# EAGLE board Wykrywacz metali PI (EAGLE 4.16)
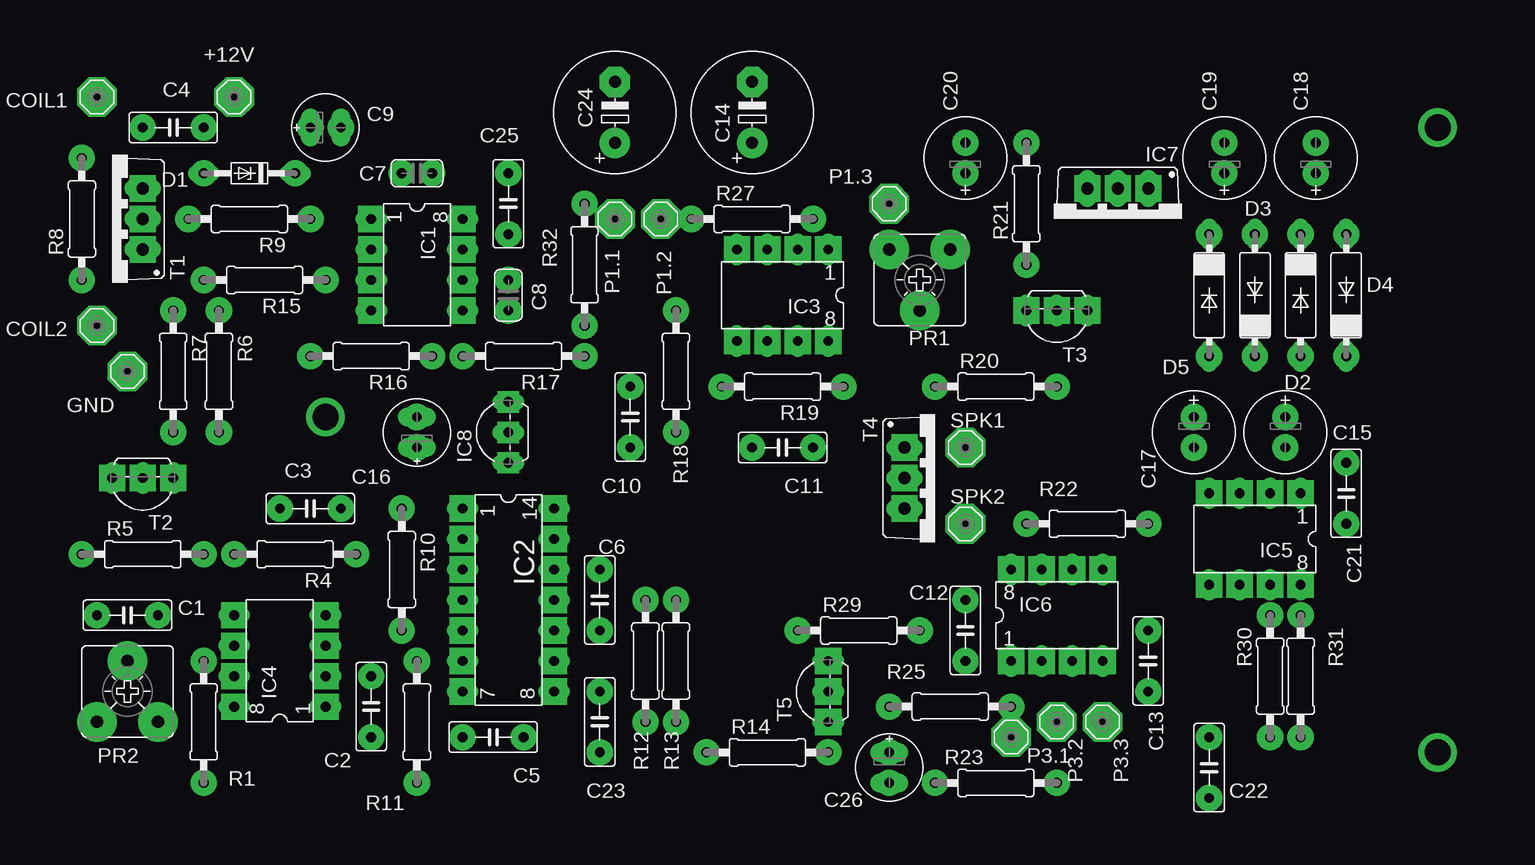
[diagram p0: board, top side]
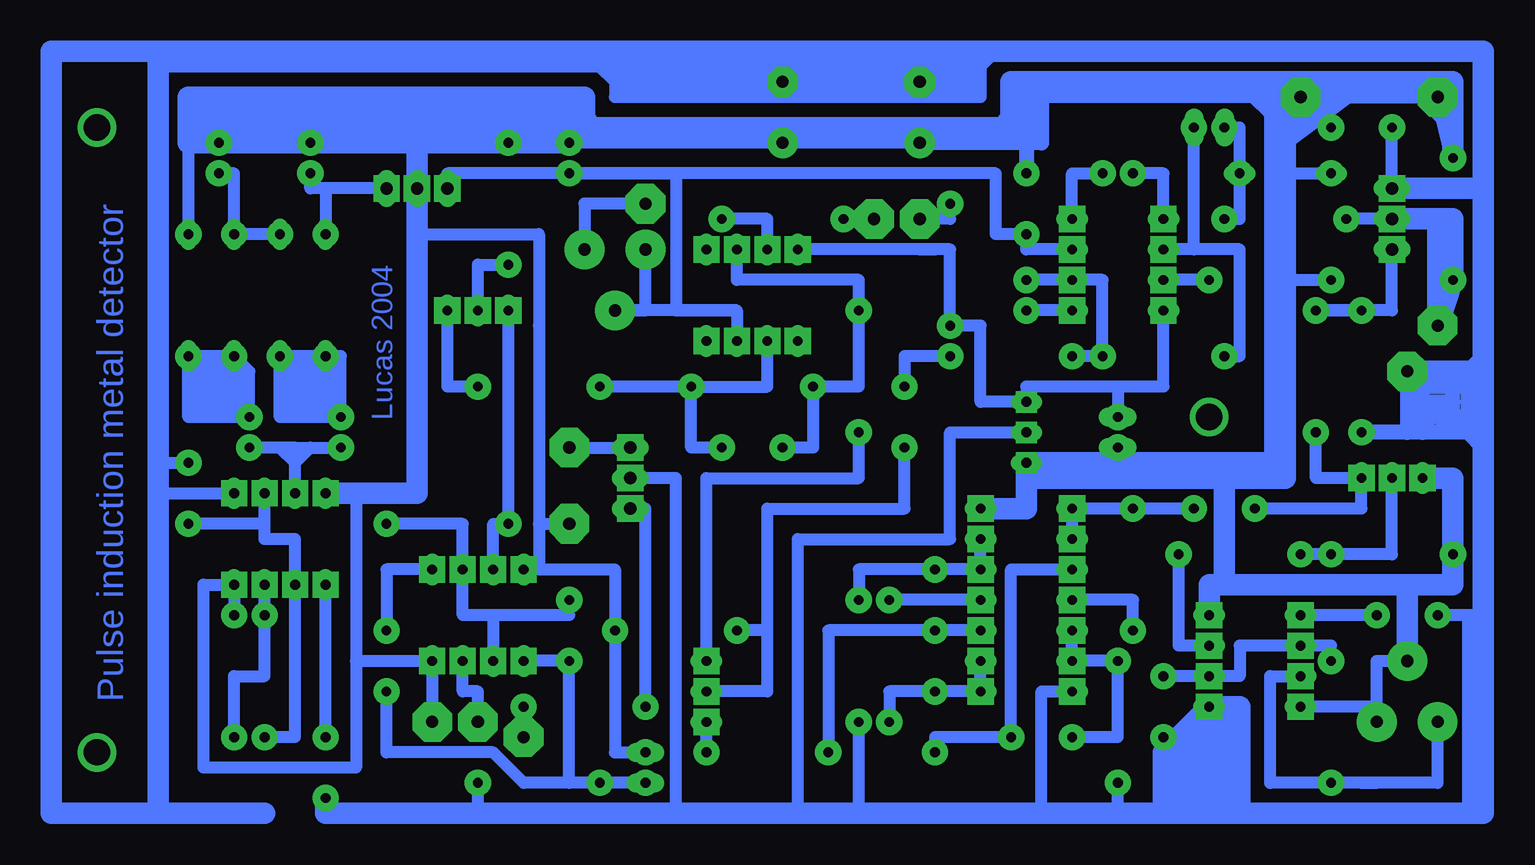
[diagram p1: board, bottom side, seen from below]

No outline drawn. Coordinates in mm, seen from the top.
Copper layers 16: Bottom 0.035mm
Design rules "default": minimum track width 10mil, minimum drill 24mil, track to track 8mil, track to pad 8mil, pad to pad 8mil, via to via 8mil, smd to smd 8mil, copper to edge 40mil, drill to drill 8mil, minimum pad ring 10mil, minimum via ring 8mil, stop-mask expansion 0mil, vias tented up to drill 0mil, thermal gap 10mil

## Footprints (pad centres in the part's own frame; a part is rotated, then mirrored left to right if it is on the bottom)
MCS10B = drill 1.016 pad 2.159 octagon: MP 0,0
C050-025X075 = drill 0.813 octagon: 1 -2.54,0; 2 2.54,0
C025-024X044 = drill 0.813 octagon: 1 -1.27,0; 2 1.27,0
E2,5-6E = drill 0.813 pad 1.575 long: + -1.27,0; - 1.27,0
E5-10,5 = drill 1.016 pad 2.54 round: + -2.54,0 | drill 1.016 pad 2.54 octagon: - 2.54,0
E2,5-7 = drill 0.813 pad 1.6 round: + -1.27,0 | drill 0.813 pad 1.6 octagon: - 1.27,0
DO34Z7 = drill 0.813 long: A 3.81,0; K -3.81,0
DO07 = drill 0.813 long: A 5.08,0; K -5.08,0
DIL08 = drill 0.813 long: 1 -3.81,-3.81; 2 -1.27,-3.81; 3 1.27,-3.81; 4 3.81,-3.81; 5 3.81,3.81; 6 1.27,3.81; 7 -1.27,3.81; 8 -3.81,3.81
DIL14 = drill 0.813 long: 1 -7.62,-3.81; 2 -5.08,-3.81; 3 -2.54,-3.81; 4 0,-3.81; 5 2.54,-3.81; 6 5.08,-3.81; 7 7.62,-3.81; 8 7.62,3.81; 9 5.08,3.81; 10 2.54,3.81; 11 0,3.81; 12 -2.54,3.81; 13 -5.08,3.81; 14 -7.62,3.81
TO220V = drill 1.016 long: 1 -2.54,-2.54; 2 0,-2.54; 3 2.54,-2.54
TO92- = drill 0.813 long: 1 2.54,-1.27; 2 0,-1.27; 3 -2.54,-1.27
CA6V = drill 1.016 long: 1 -2.54,-2.54; 2 0,2.54; 3 2.54,-2.54
0207/10 = drill 0.813 octagon: 1 -5.08,0; 2 5.08,0

## Placement (x,y rotation side)
+12V  [MCS10B]  2.54,80.01 0 top
C1  [C050-025X075]  -6.35,36.83 0 top
C2  [C050-025X075]  13.97,29.21 90 top
C3  [C050-025X075]  8.89,45.72 0 top
C4  [C050-025X075]  -2.54,77.47 0 top
C5  [C050-025X075]  24.13,26.67 0 top
C6  [C050-025X075]  33.02,38.1 90 top
C7  [C025-024X044]  17.78,73.66 180 top
C8  [C025-024X044]  25.4,63.5 90 top
C9  [E2,5-6E]  10.16,77.47 0 top
C10  [C050-025X075]  35.56,53.34 90 top
C11  [C050-025X075]  48.26,50.8 180 top
C12  [C050-025X075]  63.5,35.56 270 top
C13  [C050-025X075]  78.74,33.02 270 top
C14  [E5-10,5]  45.72,78.74 90 top
C15  [E2,5-7]  90.17,52.07 270 top
C16  [E2,5-6E]  17.78,52.07 90 top
C17  [E2,5-7]  82.55,52.07 270 top
C18  [E2,5-7]  92.71,74.93 90 top
C19  [E2,5-7]  85.09,74.93 90 top
C20  [E2,5-7]  63.5,74.93 90 top
C21  [C050-025X075]  95.25,46.99 270 top
C22  [C050-025X075]  83.82,24.13 270 top
C23  [C050-025X075]  33.02,27.94 90 top
C24  [E5-10,5]  34.29,78.74 90 top
C25  [C050-025X075]  25.4,71.12 90 top
C26  [E2,5-6E]  57.15,24.13 270 top
COIL1  [MCS10B]  -8.89,80.01 0 top
COIL2  [MCS10B]  -8.89,60.96 0 top
D1  [DO34Z7]  3.81,73.66 180 top
D2  [DO07]  91.44,63.5 270 top
D3  [DO07]  87.63,63.5 90 top
D4  [DO07]  95.25,63.5 90 top
D5  [DO07]  83.82,63.5 270 top
GND  [MCS10B]  -6.35,57.15 0 top
IC1  [DIL08]  17.78,66.04 270 top
IC2  [DIL14]  25.4,38.1 270 top
IC3  [DIL08]  48.26,63.5 180 top
IC4  [DIL08]  6.35,33.02 90 top
IC5  [DIL08]  87.63,43.18 180 top
IC6  [DIL08]  71.12,36.83 0 top
IC7  [TO220V]  76.2,69.85 180 top
IC8  [TO92-]  24.13,52.07 90 top
P1.1  [MCS10B]  34.29,69.85 0 top
P1.2  [MCS10B]  38.1,69.85 0 top
P1.3  [MCS10B]  57.15,71.12 0 top
P3.1  [MCS10B]  67.31,26.67 0 top
P3.2  [MCS10B]  71.12,27.94 0 top
P3.3  [MCS10B]  74.93,27.94 0 top
PR1  [CA6V]  59.69,64.77 180 top
PR2  [CA6V]  -6.35,30.48 0 top
R1  [0207/10]  0,27.94 90 top
R4  [0207/10]  7.62,41.91 180 top
R5  [0207/10]  -5.08,41.91 0 top
R6  [0207/10]  1.27,57.15 270 top
R7  [0207/10]  -2.54,57.15 270 top
R8  [0207/10]  -10.16,69.85 90 top
R9  [0207/10]  3.81,69.85 180 top
R10  [0207/10]  16.51,40.64 270 top
R11  [0207/10]  17.78,27.94 270 top
R12  [0207/10]  36.83,33.02 270 top
R13  [0207/10]  39.37,33.02 270 top
R14  [0207/10]  46.99,25.4 0 top
R15  [0207/10]  5.08,64.77 180 top
R16  [0207/10]  13.97,58.42 180 top
R17  [0207/10]  26.67,58.42 180 top
R18  [0207/10]  39.37,57.15 90 top
R19  [0207/10]  48.26,55.88 180 top
R20  [0207/10]  66.04,55.88 0 top
R21  [0207/10]  68.58,71.12 90 top
R22  [0207/10]  73.66,44.45 180 top
R23  [0207/10]  66.04,22.86 0 top
R25  [0207/10]  62.23,29.21 180 top
R27  [0207/10]  45.72,69.85 0 top
R29  [0207/10]  54.61,35.56 0 top
R30  [0207/10]  88.9,31.75 90 top
R31  [0207/10]  91.44,31.75 90 top
R32  [0207/10]  31.75,66.04 270 top
SPK1  [MCS10B]  63.5,50.8 0 top
SPK2  [MCS10B]  63.5,44.45 0 top
T1  [TO220V]  -7.62,69.85 90 top
T2  [TO92-]  -5.08,46.99 180 top
T3  [TO92-]  71.12,60.96 180 top
T4  [TO220V]  60.96,48.26 270 top
T5  [TO92-]  50.8,30.48 90 top

## Library data of the parts
+12V COIL1 COIL2 GND P1.1-P1.3 P3.1-P3.3 SPK1 SPK2 = solpad
C1-C26 R1 R4-R23 R25 R27 R29-R32 = rcl
D1-D5 = diode
IC1 IC3-IC6 = dil
IC2 = 40xx
IC7 IC8 T1-T5 = transistor-npn
PR1 PR2 = pot

## Nets
S$1: COIL2.MP R8.1 R9.2 T1.2
S$2: R6.1 R7.1 T1.1
S$3: C19.+ D5.K IC7.1
S$4: C10.2 R17.1
S$5: C3.1 R6.2 T2.3
S$6: R4.2 R5.2 T2.2
S$8: C3.2 IC2.1 IC2.2
S$9: IC4.3 R4.1
S$10: C16.+ C18.- C19.- C20.- C25.2 C26.+ COIL1.MP D1.A D4.A IC2.14 IC4.4 IC4.8 IC5.4 IC5.8 IC6.4 IC6.8 IC7.2 IC8.3 P3.3.MP PR2.2 PR2.3 R5.1 R8.2 R15.2 R21.2 R29.2 R31.2 SPK2.MP T2.1
S$11: C2.2 IC4.2 IC4.6 R1.2
S$12: C1.2 IC4.5
S$13: IC2.4 R10.2
S$14: C5.1 IC2.5 IC2.6 R11.1
S$15: C5.2 C23.1 IC2.3
S$16: C23.2 IC2.8 IC2.9 R12.2
S$17: C6.1 IC2.10 R14.1
S$18: C12.2 C13.2 C26.- IC6.1 R23.1
S$19: IC2.11 R12.1
S$20: C6.2 IC2.12 IC2.13 R13.1
S$21: C11.1 IC3.6 R19.1 R20.1
S$22: C9.+ D1.K R9.1
S$23: C7.2 IC1.1
S$24: C7.1 IC1.8
S$25: R18.1 T5.1
S$26: C8.1 IC1.5
S$27: C22.1 IC5.5
S$28: C9.- IC1.2 R16.2
S$29: IC1.3 R15.1
S$30: IC6.7 R22.2 T3.1
S$31: C8.2 IC1.6 R16.1 R17.2
S$32: C10.1 R29.1 T5.2
S$33: R14.2 T5.3
S$34: C1.1 C2.1 C14.- C21.1 C22.2 C24.- GND.MP IC2.7 IC4.1 IC5.1 IC8.2 R7.2 R11.2 R13.2 R23.2 T1.3 T4.2
S$35: C16.- IC1.4 IC3.4 IC8.1 R32.2
S$36: IC3.3 R27.2
S$37: C11.2 IC3.2 R18.2 R19.2
S$38: P3.1.MP R25.1
S$39: P1.1.MP R32.1
S$40: P1.2.MP R27.1
S$41: P1.3.MP PR1.1
S$42: R20.2 T3.3
S$43: R21.1 T3.2
S$44: C12.1 IC6.2 IC6.6 R22.1
S$47: C21.2 IC5.2 IC5.6 R30.1
S$48: IC5.7 R30.2 R31.1
S$49: C15.- C17.- IC5.3
S$50: C17.+ D3.K D5.A
S$51: C15.+ D2.A D4.K
S$52: D2.K D3.A
S$53: IC4.7 PR2.1 R1.1
S$54: C13.1 IC6.5
S$55: C20.+ C25.1 IC1.7 IC3.7 IC7.3 PR1.2 PR1.3

## Tracks (layer width: path | path; a pad name or v marks a point on that pad's centre or on a via)
S$1  (via drill 0.25 pad 3.3)
  Bottom 1.016: T1.2 R9.2 | COIL2.MP R8.1
  Bottom 1.778: -8.89,69.85 -10.16,69.85 R8.1 COIL2.MP -8.89,69.85 | -8.89,69.85 T1.2
  other vias: -8.89,60.96
S$2
  Bottom 1.016: R7.1 R6.1 -5.08,62.23 T1.1
S$3
  Bottom 1.016: 83.82,72.39 D5.K | IC7.1 83.82,72.39 | 83.82,72.39 85.09,72.39 C19.+
S$4
  Bottom 1.016: R17.1 35.56,58.42 C10.2
S$5
  Bottom 1.016: C3.1 -2.54,45.72 T2.3 1.27,48.26 R6.2
S$6
  Bottom 1.016: T2.2 -5.08,41.91 R5.2 R4.2
S$7  (via drill 0.25 pad 2.18)
  other vias: 78.74,72.39
S$8
  Bottom 1.016: IC2.2 IC2.1 C3.2
S$9
  Bottom 1.016: IC4.3 12.7,34.29 R4.1
S$10  (via drill 0.25 pad 2.18, 0.25 pad 3.3)
  Bottom 1.016: C26.+ 59.69,25.4 R29.2 59.69,40.64 66.04,40.64 | R31.2 IC5.8 93.98,39.37 93.98,24.13 81.28,24.13 | 66.04,40.64 IC6.8 | 66.04,44.45 SPK2.MP | 66.04,44.45 66.04,40.64 | P3.3.MP IC6.4 81.28,33.02 | 81.28,33.02 81.28,24.13 | 66.04,68.58 66.04,60.96 | 66.04,68.58 66.04,44.45 | 95.25,80.01 92.71,80.01 | 85.09,80.01 C19.- | 85.09,80.01 92.71,80.01 | C18.- 92.71,80.01 | 95.25,76.2 D4.A | 76.2,68.58 66.04,68.58 | 81.28,46.99 81.28,33.02 | 81.28,46.99 81.28,24.13 | 81.28,46.99 IC5.4 | 68.58,80.01 R21.2 | 68.58,80.01 63.5,80.01 63.5,78.74 | 81.28,46.99 76.2,46.99 76.2,68.58 | 76.2,68.58 IC7.2 76.2,76.2 76.2,80.01 | 76.2,80.01 85.09,80.01 | 76.2,80.01 68.58,80.01 | 60.96,77.47 62.23,78.74 | 27.94,77.47 26.67,78.74 | C25.2 25.4,76.2 | 25.4,76.2 25.4,77.47 25.4,80.01 | 25.4,76.2 34.29,76.2 C20.- | R8.2 COIL1.MP -1.27,80.01 0,80.01 2.54,80.01 3.81,80.01 5.08,80.01 | 24.13,80.01 6.35,80.01 5.08,80.01 | 5.08,80.01 5.08,78.74 5.08,73.66 | 5.08,73.66 D1.A | 5.08,64.77 5.08,73.66 | 5.08,64.77 R15.2 | 5.08,64.77 5.08,49.53 8.89,49.53 | -6.35,39.37 8.89,39.37 | PR2.2 -3.81,33.02 -3.81,29.21 | -3.81,29.21 IC4.8 | PR2.3 -3.81,29.21 | 17.78,49.53 C16.+
  Bottom 1.27: 24.13,81.28 25.4,81.28 25.4,80.01 | 34.29,76.2 24.13,76.2 24.13,80.01 25.4,80.01 | 25.4,80.01 C25.2 | -10.16,77.47 COIL1.MP R8.2 -10.16,77.47 | -10.16,77.47 -6.35,81.28 -10.16,81.28 -10.16,77.47 | 5.08,78.74 6.35,80.01 | 3.81,76.2 -1.27,80.01 | 2.54,80.01 2.54,78.74 0,80.01 3.81,77.47 2.54,80.01
  Bottom 1.778: 93.98,77.47 64.77,77.47 | 93.98,77.47 93.98,78.74 63.5,78.74 C20.- 76.2,76.2 | IC5.4 76.2,46.99 76.2,76.2 | 93.98,76.2 95.25,76.2 95.25,80.01 62.23,80.01 62.23,78.74 62.23,77.47 60.96,77.47 27.94,77.47 25.4,77.47 | 93.98,76.2 C18.- | 93.98,76.2 93.98,77.47 | 76.2,76.2 93.98,76.2 | 26.67,78.74 26.67,81.28 24.13,81.28 -2.54,81.28 | -2.54,81.28 -6.35,81.28 COIL1.MP | 3.81,80.01 3.81,77.47 3.81,76.2 3.81,53.34 | IC2.14 25.4,45.72 25.4,48.26 | 3.81,53.34 3.81,48.26 25.4,48.26 | T2.1 -10.16,48.26 R5.1 -10.16,39.37 -6.35,39.37 | 25.4,48.26 IC8.3 17.78,49.53 8.89,49.53 | 3.81,53.34 3.81,49.53 8.89,49.53 | 10.16,39.37 IC4.4 | 8.89,49.53 8.89,39.37 10.16,39.37 | -6.35,39.37 10.16,39.37 | PR2.2 -6.35,39.37 | -2.54,81.28 -10.16,81.28 R8.2
  other vias: -8.89,80.01 63.5,44.45 -10.16,74.93
S$11
  Bottom 1.016: R1.2 0,34.29 IC4.6 7.62,34.29 7.62,31.75 IC4.2 C2.2
S$12
  Bottom 1.016: C1.2 IC4.5
S$13
  Bottom 1.016: R10.2 16.51,38.1 IC2.4
S$14
  Bottom 1.016: C5.1 17.78,26.67 R11.1 IC2.6 IC2.5
S$15
  Bottom 1.016: IC2.3 26.67,40.64 C5.2 33.02,26.67 C23.1
S$16
  Bottom 1.016: IC2.9 IC2.8 C23.2 36.83,30.48 R12.2
S$17
  Bottom 1.016: IC2.10 C6.1 41.91,35.56 R14.1
S$18
  Bottom 1.016: IC6.1 C12.2 63.5,22.86 | 63.5,22.86 R23.1 C26.- | C13.2 78.74,25.4 69.85,25.4 67.31,22.86 63.5,22.86
S$19
  Bottom 1.016: IC2.11 R12.1
S$20
  Bottom 1.016: IC2.12 C6.2 39.37,40.64 | IC2.12 IC2.13 IC2.12 | 39.37,40.64 R13.1 | IC2.12 39.37,40.64
S$21
  Bottom 1.016: IC3.6 46.99,55.88 R19.1 | R19.1 53.34,50.8 C11.1 | R19.1 R20.1
S$22
  Bottom 1.016: R9.1 7.62,69.85 D1.K 7.62,77.47 C9.+
S$23
  Bottom 1.016: IC1.1 13.97,73.66 C7.2
S$24
  Bottom 1.016: IC1.8 21.59,73.66 C7.1
S$25
  Bottom 1.016: R18.1 39.37,48.26 52.07,48.26 T5.1
S$26
  Bottom 1.016: IC1.5 C8.1
S$27
  Bottom 1.016: C22.1 IC5.5
S$28
  Bottom 1.016: 11.43,67.31 7.62,67.31 7.62,58.42 R16.2 | 11.43,67.31 C9.- | 11.43,67.31 IC1.2
S$29
  Bottom 1.016: R15.1 IC1.3
S$30
  Bottom 1.016: T3.1 R22.2 69.85,44.45 IC6.7
S$31
  Bottom 1.016: C8.2 IC1.6 19.05,64.77 R16.1 R17.2
S$32
  Bottom 1.016: C10.1 35.56,45.72 46.99,45.72 46.99,35.56 | 46.99,35.56 R29.1 | 46.99,35.56 46.99,30.48 T5.2
S$33
  Bottom 1.016: R14.2 T5.3
S$34  (via drill 0.25 pad 2.18)
  Bottom 1.016: 97.79,46.99 IC5.1 | 97.79,49.53 C21.1 | 97.79,49.53 97.79,46.99 | IC8.2 31.75,52.07 31.75,43.18 44.45,43.18 44.45,20.32 | 97.79,38.1 97.79,46.99 | 97.79,49.53 97.79,82.55 60.96,82.55 | 46.99,83.82 45.72,83.82 | 45.72,83.82 C14.- | T4.2 54.61,48.26 54.61,20.32 | 71.12,20.32 R23.2 | 71.12,20.32 83.82,20.32 | 54.61,20.32 71.12,20.32 | 44.45,20.32 54.61,20.32 | 34.29,83.82 45.72,83.82 | 34.29,83.82 34.29,82.55 | 34.29,83.82 C24.- | 34.29,83.82 27.94,83.82 29.21,82.55 | T1.3 -5.08,77.47 | IC2.7 24.13,30.48 24.13,20.32 | 39.37,20.32 44.45,20.32 | 39.37,20.32 54.61,20.32 | 39.37,20.32 R13.2 | IC4.1 10.16,26.67 12.7,26.67 C2.1 13.97,25.4 | 24.13,20.32 39.37,20.32 | -6.35,52.07 R7.2 | 17.78,20.32 24.13,20.32 | 17.78,20.32 R11.2 | 13.97,20.32 17.78,20.32 | -12.7,36.83 -12.7,50.8 | -12.7,36.83 -11.43,36.83 | -11.43,36.83 C1.1 | -12.7,20.32 -12.7,36.83 | -11.43,20.32 -11.43,36.83 | 29.21,82.55 29.21,81.28 | 29.21,81.28 29.21,80.01 59.69,80.01 59.69,81.28 | 59.69,83.82 59.69,82.55 | 29.21,82.55 30.48,82.55 | 29.21,82.55 30.48,81.28 | 30.48,81.28 31.75,81.28 | 31.75,81.28 39.37,81.28 | 41.91,81.28 39.37,81.28 | 58.42,81.28 41.91,81.28 | 59.69,82.55 58.42,82.55 | 58.42,82.55 53.34,82.55 | 33.02,82.55 38.1,82.55 | 31.75,82.55 33.02,82.55 | 30.48,82.55 31.75,82.55 | 30.48,82.55 30.48,81.28 | 30.48,81.28 31.75,82.55 | 31.75,81.28 31.75,82.55 | 31.75,81.28 33.02,82.55 | 33.02,82.55 39.37,81.28 | 58.42,82.55 39.37,81.28 | 58.42,81.28 53.34,82.55 | 53.34,82.55 38.1,82.55 | 41.91,81.28 38.1,82.55 | 58.42,82.55 41.91,81.28 | 58.42,81.28 58.42,82.55 | 59.69,82.55 59.69,81.28 | 58.42,81.28 59.69,82.55 | 58.42,81.28 59.69,81.28 | 29.21,81.28 58.42,81.28 | 59.69,82.55 60.96,82.55 | 59.69,81.28 60.96,82.55
  Bottom 1.27: GND.MP -6.35,52.07 -7.62,52.07 | -12.7,52.07 -11.43,52.07 | -11.43,52.07 -7.62,52.07 | -7.62,52.07 R7.2 | -7.62,52.07 -7.62,54.61 | -7.62,54.61 -7.62,55.88 -10.16,55.88 | -10.16,55.88 -11.43,55.88 -11.43,53.34 | -11.43,53.34 -10.16,53.34 | -10.16,53.34 -8.89,53.34 -7.62,54.61 | -7.62,54.61 -8.89,54.61 | -8.89,54.61 -10.16,54.61 | -10.16,53.34 -10.16,55.88 | -7.62,52.07 -8.89,54.61 | -11.43,53.34 -12.7,50.8 -11.43,52.07 | -11.43,53.34 -11.43,52.07 | -12.7,58.42 -10.16,55.88
  Bottom 1.778: -12.7,57.15 GND.MP | -12.7,57.15 -12.7,58.42 -12.7,72.39 | -12.7,72.39 -12.7,83.82 27.94,83.82 50.8,83.82 | -12.7,72.39 T1.3 | 50.8,83.82 59.69,83.82 97.79,83.82 | 50.8,83.82 46.99,83.82 | 97.79,83.82 97.79,82.55 97.79,38.1 97.79,20.32 | 97.79,20.32 96.52,20.32 | 7.62,20.32 13.97,20.32 | 7.62,20.32 -11.43,20.32 -12.7,20.32 -12.7,50.8 -12.7,52.07 -12.7,57.15 | IC4.1 7.62,29.21 7.62,20.32 | 7.62,20.32 11.43,20.32 12.7,21.59 12.7,25.4 8.89,25.4 | 8.89,25.4 8.89,27.94 | 8.89,25.4 8.89,21.59 11.43,21.59 11.43,24.13 10.16,24.13 | 10.16,24.13 10.16,22.86 | IC4.1 10.16,24.13 | IC4.1 12.7,26.67 13.97,25.4 13.97,20.32 | 97.79,20.32 106.68,20.32 106.68,83.82 97.79,83.82 | 97.79,20.32 88.9,20.32 | C22.2 83.82,20.32 13.97,20.32
  other vias: 83.82,21.59
S$35
  Bottom 1.016: 17.78,55.88 C16.- | 17.78,55.88 25.4,55.88 IC8.1 29.21,54.61 29.21,60.96 R32.2 31.75,67.31 34.29,67.31 | IC1.4 13.97,55.88 17.78,55.88 | 34.29,67.31 33.02,67.31 | 34.29,67.31 IC3.4
S$36
  Bottom 1.016: IC3.3 46.99,69.85 R27.2
S$37
  Bottom 1.016: C11.2 43.18,50.8 R19.2 39.37,55.88 R18.2 39.37,64.77 49.53,64.77 IC3.2
S$38
  Bottom 1.016: P3.1.MP R25.1
S$39
  Bottom 1.016: R32.1 31.75,69.85 P1.1.MP
S$40
  Bottom 1.016: P1.2.MP R27.1
S$41
  Bottom 1.016: P1.3.MP 62.23,71.12 PR1.1
S$42
  Bottom 1.016: R20.2 73.66,55.88 T3.3
S$43
  Bottom 1.016: T3.2 71.12,66.04 R21.1
S$44
  Bottom 1.016: 69.85,36.83 72.39,36.83 IC6.6 72.39,44.45 R22.1 | 69.85,36.83 IC6.2 | C12.1 63.5,36.83 69.85,36.83
S$45  (via drill 0.25 pad 2.18)
  other vias: 8.89,58.42
S$47
  Bottom 1.016: 88.9,44.45 88.9,43.18 86.36,43.18 IC5.6 86.36,26.67 R30.1 | 88.9,44.45 IC5.2 | 88.9,44.45 C21.2
S$48
  Bottom 1.016: IC5.7 R30.2 88.9,31.75 91.44,31.75 R31.1
S$49
  Bottom 1.016: 86.36,50.8 87.63,50.8 | 87.63,50.8 C15.- | 85.09,50.8 C17.- | 86.36,50.8 85.09,50.8 | 86.36,49.53 86.36,50.8 | IC5.3 86.36,49.53 | 86.36,49.53 85.09,50.8 | 86.36,49.53 87.63,50.8
S$50
  Bottom 1.016: D5.A D3.K 87.63,53.34 C17.+ D5.A
S$51
  Bottom 1.016: D2.A D4.K 95.25,53.34 C15.+ | C15.+ 90.17,57.15 D2.A | C15.+ D2.A
S$52  (via drill 0.25 pad 2.18)
  Bottom 1.016: D3.A D2.K 91.44,73.66 v92.71,73.66
S$53
  Bottom 1.016: IC4.7 5.08,31.75 5.08,22.86 R1.1 -2.54,22.86 | -2.54,22.86 -3.81,22.86 | -2.54,22.86 -8.89,22.86 PR2.1
S$54
  Bottom 1.016: IC6.5 78.74,40.64 C13.1
S$55
  Bottom 1.016: PR1.3 57.15,62.23 PR1.2 49.53,62.23 | 49.53,62.23 IC3.7 | IC7.3 73.66,73.66 C20.+ | 49.53,62.23 54.61,62.23 54.61,73.66 C20.+ | C20.+ 27.94,73.66 27.94,68.58 C25.1 25.4,67.31 IC1.7
S$56  (via drill 0.61)
  other vias: 10.16,53.34
S$57  (via drill 0.61)
  other vias: 102.87,77.47
S$58  (via drill 0.25 pad 3.3)
  other vias: 57.15,71.12
S$59  (via drill 2.18)
  other vias: 102.87,77.47
S$60  (via drill 0.25 pad 1.42)
  other vias: 102.87,77.47
S$61  (via drill 0.25 pad 2.18)
  other vias: 92.71,76.2
S$62  (via drill 0.25 pad 1.42)
  other vias: 102.87,25.4
S$63  (via drill 0.25 pad 2.18)
  other vias: 85.09,76.2
S$64  (via drill 0.25 pad 2.18)
  other vias: 85.09,73.66
S$65  (via drill 0.25 pad 1.42)
  other vias: 10.16,53.34
S$66  (via drill 0.25 pad 2.18)
  other vias: 95.25,68.58
S$67  (via drill 0.25 pad 3.3)
  other vias: -3.81,27.94
S$68  (via drill 0.25 pad 3.3)
  other vias: 62.23,67.31
S$69  (via drill 0.25 pad 2.18)
  other vias: 21.59,64.77
S$70  (via drill 0.25 pad 1.78)
  other vias: 91.44,46.99
S$71  (via drill 0.25 pad 3.3)
  other vias: 74.93,27.94
S$72  (via drill 0.25 pad 3.3)
  other vias: -6.35,57.15
S$73  (via drill 0.25 pad 2.18)
  other vias: 67.31,29.21
S$74  (via drill 0.25 pad 3.3)
  other vias: 2.54,80.01
S$75  (via drill 0.25 pad 2.18, 0.25 pad 3.3)
  Bottom 1.016: v63.5,50.8 v58.42,50.8
  other vias: 52.07,59.69 49.53,59.69 46.99,59.69 44.45,59.69 52.07,67.31 49.53,67.31 46.99,67.31 44.45,67.31
S$76  (via drill 0.25 pad 3.3)
  other vias: 38.1,69.85
S$77  (via drill 0.25 pad 2.18)
  other vias: -10.16,64.77
S$78  (via drill 0.25 pad 2.18)
  other vias: 1.27,52.07
S$79  (via drill 0.25 pad 2.18)
  other vias: -2.54,52.07
S$80  (via drill 0.25 pad 2.18)
  other vias: 0,64.77
S$81  (via drill 0.25 pad 2.18)
  other vias: -5.08,69.85
S$82  (via drill 0.25 pad 2.18)
  other vias: -1.27,69.85
S$83  (via drill 0.25 pad 2.18)
  other vias: 0,77.47
S$84  (via drill 0.25 pad 2.18)
  other vias: -5.08,77.47
S$86  (via drill 0.25 pad 2.18)
  other vias: 0,73.66
S$87  (via drill 0.25 pad 2.18)
  other vias: 8.89,69.85
S$88  (via drill 0.25 pad 2.18)
  other vias: 7.62,73.66
S$89  (via drill 0.25 pad 2.18)
  other vias: 11.43,77.47
S$90  (via drill 0.25 pad 2.18)
  other vias: 8.89,77.47
S$91  (via drill 0.25 pad 2.18)
  other vias: 19.05,73.66
S$92  (via drill 0.25 pad 2.18)
  other vias: 45.72,81.28
S$93  (via drill 0.25 pad 2.18)
  other vias: 25.4,68.58
S$94  (via drill 0.25 pad 2.18)
  other vias: 25.4,73.66
S$95  (via drill 0.25 pad 2.18)
  other vias: 31.75,71.12
S$96  (via drill 0.25 pad 2.18)
  other vias: 34.29,76.2
S$97  (via drill 0.25 pad 2.18)
  other vias: 45.72,76.2
S$98  (via drill 0.25 pad 2.18)
  other vias: 34.29,81.28
S$99  (via drill 2.18)
  other vias: 10.16,53.34
S$100  (via drill 0.25 pad 2.18)
  other vias: 40.64,69.85
S$101  (via drill 0.25 pad 2.18)
  other vias: -10.16,41.91
S$102  (via drill 0.25 pad 2.18)
  other vias: 25.4,64.77
S$103  (via drill 0.25 pad 2.18)
  other vias: 102.87,77.47
S$104  (via drill 0.25 pad 2.18)
  other vias: 39.37,52.07
S$105  (via drill 0.25 pad 2.18)
  other vias: 35.56,50.8
S$106  (via drill 0.25 pad 2.18)
  other vias: 35.56,55.88
S$107  (via drill 0.25 pad 2.18)
  other vias: 43.18,55.88
S$108  (via drill 0.25 pad 2.18)
  other vias: 45.72,50.8
S$109  (via drill 0.25 pad 2.18)
  other vias: 102.87,25.4
S$110  (via drill 0.25 pad 2.18)
  other vias: 10.16,64.77
S$111  (via drill 0.25 pad 2.18)
  other vias: 21.59,58.42
S$112  (via drill 0.25 pad 2.18)
  other vias: 17.78,53.34
S$113  (via drill 0.25 pad 2.18)
  other vias: 12.7,41.91
S$114  (via drill 0.25 pad 2.18)
  other vias: 16.51,45.72
S$115  (via drill 0.25 pad 1.78)
  other vias: -5.08,48.26
S$116  (via drill 0.25 pad 1.78)
  other vias: -2.54,48.26
S$117  (via drill 0.25 pad 1.78)
  other vias: -7.62,48.26
S$118  (via drill 0.25 pad 2.18)
  other vias: 6.35,45.72
S$119  (via drill 0.25 pad 2.18)
  other vias: 11.43,45.72
S$120  (via drill 0.25 pad 1.78)
  other vias: 10.16,31.75
S$121  (via drill 0.25 pad 1.78)
  other vias: 25.4,52.07
S$122  (via drill 0.25 pad 1.78)
  other vias: 29.21,45.72
S$123  (via drill 0.25 pad 1.78)
  other vias: 21.59,45.72
S$124  (via drill 0.25 pad 1.78)
  other vias: 21.59,43.18
S$125  (via drill 0.25 pad 1.78)
  other vias: 21.59,40.64
S$126  (via drill 0.25 pad 1.78)
  other vias: 21.59,33.02
S$127  (via drill 0.25 pad 1.78)
  other vias: 2.54,31.75
S$128  (via drill 0.25 pad 2.18)
  other vias: 2.54,41.91
S$129  (via drill 0.25 pad 2.18)
  other vias: 0,33.02
S$130  (via drill 0.25 pad 2.18)
  other vias: -3.81,36.83
S$131  (via drill 0.25 pad 2.18)
  other vias: 0,41.91
S$132  (via drill 0.25 pad 1.78)
  other vias: 2.54,36.83
S$133  (via drill 0.25 pad 1.78)
  other vias: 2.54,34.29
S$134  (via drill 0.25 pad 1.78)
  other vias: 2.54,29.21
S$135  (via drill 0.25 pad 2.18)
  other vias: 0,22.86
S$136  (via drill 0.25 pad 3.3)
  other vias: -6.35,33.02
S$137  (via drill 0.25 pad 3.3)
  other vias: -8.89,27.94
S$138  (via drill 0.25 pad 2.18)
  other vias: 16.51,35.56
S$139  (via drill 0.25 pad 2.18)
  other vias: 13.97,31.75
S$140  (via drill 0.25 pad 2.18)
  other vias: 13.97,26.67
S$141  (via drill 0.25 pad 2.18)
  other vias: 17.78,22.86
S$142  (via drill 0.25 pad 2.18)
  other vias: 21.59,26.67
S$143  (via drill 0.25 pad 2.18)
  other vias: 26.67,26.67
S$144  (via drill 0.25 pad 2.18)
  other vias: 33.02,25.4
S$145  (via drill 0.25 pad 1.78)
  other vias: 29.21,33.02
S$146  (via drill 0.25 pad 2.18)
  other vias: 39.37,38.1
S$147  (via drill 0.25 pad 2.18)
  other vias: 33.02,35.56
S$148  (via drill 0.25 pad 2.18)
  other vias: 33.02,40.64
S$149  (via drill 0.25 pad 2.18)
  other vias: 33.02,30.48
S$150  (via drill 0.25 pad 2.18)
  other vias: 36.83,27.94
S$151  (via drill 0.25 pad 2.18)
  other vias: 39.37,27.94
S$152  (via drill 0.25 pad 2.18)
  other vias: 41.91,25.4
S$153  (via drill 0.25 pad 2.18)
  other vias: 49.53,35.56
S$154  (via drill 0.25 pad 1.78)
  other vias: 52.07,33.02
S$155  (via drill 0.25 pad 2.18)
  other vias: 52.07,25.4
S$156  (via drill 0.25 pad 1.78)
  other vias: 52.07,27.94
S$157  (via drill 0.25 pad 1.78)
  other vias: 52.07,30.48
S$158  (via drill 0.25 pad 2.18)
  other vias: 71.12,22.86
S$159  (via drill 0.25 pad 2.18)
  other vias: 63.5,76.2
S$160  (via drill 0.25 pad 1.78)
  other vias: 10.16,36.83
S$161  (via drill 0.25 pad 1.78)
  other vias: 10.16,34.29
S$162  (via drill 0.25 pad 1.78)
  other vias: 10.16,29.21
S$163  (via drill 0.25 pad 2.18)
  other vias: 17.78,33.02
S$164  (via drill 0.25 pad 1.78)
  other vias: 21.59,38.1
S$165  (via drill 0.25 pad 1.78)
  other vias: 21.59,35.56
S$166  (via drill 0.25 pad 1.78)
  other vias: 21.59,30.48
S$167  (via drill 0.25 pad 1.78)
  other vias: 29.21,43.18
S$168  (via drill 0.25 pad 1.78)
  other vias: 29.21,40.64
S$169  (via drill 0.25 pad 1.78)
  other vias: 29.21,38.1
S$170  (via drill 0.25 pad 1.78)
  other vias: 29.21,35.56
S$171  (via drill 0.25 pad 1.78)
  other vias: 29.21,30.48
S$172  (via drill 0.25 pad 1.78)
  other vias: 25.4,54.61
S$173  (via drill 0.25 pad 1.78)
  other vias: 25.4,49.53
S$174  (via drill 0.25 pad 2.18)
  other vias: 17.78,50.8
S$175  (via drill 0.25 pad 2.18)
  other vias: 19.05,58.42
S$176  (via drill 0.25 pad 2.18)
  other vias: 31.75,58.42
S$177  (via drill 0.25 pad 1.78)
  other vias: 44.45,59.69
S$178  (via drill 0.25 pad 1.78)
  other vias: 46.99,59.69
S$179  (via drill 0.25 pad 1.78)
  other vias: 49.53,59.69
S$180  (via drill 0.25 pad 1.78)
  other vias: 52.07,67.31
S$181  (via drill 0.25 pad 1.78)
  other vias: 52.07,59.69
S$182  (via drill 0.25 pad 2.18)
  other vias: 50.8,50.8
S$183  (via drill 0.25 pad 2.18)
  other vias: 53.34,55.88
S$184  (via drill 0.25 pad 2.18)
  other vias: 36.83,38.1
S$185  (via drill 0.25 pad 2.18)
  other vias: 59.69,35.56
S$186  (via drill 0.25 pad 2.18)
  other vias: 63.5,33.02
S$187  (via drill 0.25 pad 2.18)
  other vias: 63.5,38.1
S$188  (via drill 0.25 pad 2.18)
  Bottom 1.016: v58.42,45.72 57.15,45.72 v57.15,29.21
S$189  (via drill 0.25 pad 2.18)
  other vias: 58.42,48.26
S$191  (via drill 0.25 pad 2.18)
  other vias: 102.87,77.47
S$192  (via drill 0.25 pad 1.78)
  other vias: 73.66,62.23
S$193  (via drill 0.25 pad 2.18)
  other vias: 57.15,25.4
S$194  (via drill 0.25 pad 2.18)
  other vias: 68.58,44.45
S$195  (via drill 0.25 pad 1.78)
  other vias: 69.85,40.64
S$196  (via drill 0.25 pad 1.78)
  other vias: 67.31,40.64
S$197  (via drill 0.25 pad 1.78)
  other vias: 72.39,40.64 72.39,40.64
S$198  (via drill 0.25 pad 1.78)
  other vias: 69.85,33.02
S$199  (via drill 0.25 pad 1.78)
  other vias: 74.93,40.64 72.39,40.64
S$200  (via drill 0.25 pad 2.18)
  other vias: 91.44,36.83
S$201  (via drill 0.25 pad 2.18)
  other vias: 78.74,35.56
S$202  (via drill 0.25 pad 1.78)
  other vias: 74.93,33.02
S$203  (via drill 0.25 pad 1.78, 0.25 pad 3.3)
  Bottom 1.016: v71.12,27.94 71.12,30.48 72.39,30.48 v72.39,33.02
S$204  (via drill 0.25 pad 1.78)
  other vias: 67.31,33.02
S$205  (via drill 0.25 pad 3.3)
  other vias: 67.31,26.67
S$206  (via drill 0.25 pad 2.18)
  other vias: 10.16,53.34
S$207  (via drill 0.25 pad 2.18)
  other vias: 78.74,30.48
S$208  (via drill 0.25 pad 2.18)
  other vias: 60.96,22.86
S$210  (via drill 0.25 pad 2.18)
  other vias: 83.82,26.67
S$211  (via drill 0.25 pad 2.18)
  other vias: 88.9,26.67
S$212  (via drill 0.25 pad 2.18)
  other vias: 91.44,26.67
S$213  (via drill 0.25 pad 2.18)
  other vias: 88.9,36.83
S$214  (via drill 0.25 pad 1.78)
  other vias: 86.36,39.37
S$215  (via drill 0.25 pad 1.78)
  other vias: 88.9,39.37
S$216  (via drill 0.25 pad 1.78)
  other vias: 83.82,39.37
S$217  (via drill 0.25 pad 1.78)
  other vias: 91.44,39.37
S$218  (via drill 0.25 pad 2.18)
  other vias: 78.74,44.45
S$219  (via drill 0.25 pad 2.18)
  other vias: 95.25,44.45
S$220  (via drill 0.25 pad 1.78)
  other vias: 86.36,46.99
S$221  (via drill 0.25 pad 1.78)
  other vias: 88.9,46.99
S$222  (via drill 0.25 pad 1.78)
  other vias: 83.82,46.99
S$223  (via drill 0.25 pad 2.18)
  other vias: 95.25,49.53
S$224  (via drill 0.25 pad 2.18)
  other vias: 90.17,50.8
S$225  (via drill 0.25 pad 2.18)
  other vias: 90.17,53.34
S$226  (via drill 0.25 pad 2.18)
  Bottom 1.016: v83.82,58.42 82.55,58.42 v82.55,53.34
S$227  (via drill 0.25 pad 2.18)
  other vias: 87.63,58.42
S$228  (via drill 0.25 pad 2.18)
  other vias: 91.44,58.42
S$229  (via drill 0.25 pad 2.18)
  other vias: 95.25,58.42
S$230  (via drill 0.25 pad 2.18)
  other vias: 71.12,55.88
S$231  (via drill 0.25 pad 1.78)
  other vias: 68.58,62.23
S$232  (via drill 0.25 pad 1.78)
  other vias: 71.12,62.23
S$233  (via drill 0.25 pad 2.18)
  other vias: 68.58,66.04
S$234  (via drill 0.25 pad 2.18)
  other vias: 83.82,68.58
S$235  (via drill 0.25 pad 2.18)
  other vias: 87.63,68.58
S$236  (via drill 0.25 pad 2.18)
  other vias: 91.44,68.58
S$237  (via drill 0.25 pad 3.3)
  other vias: 59.69,62.23
S$238  (via drill 0.25 pad 3.3)
  other vias: 57.15,67.31
S$239  (via drill 0.25 pad 2.18)
  other vias: 50.8,69.85
S$240  (via drill 0.25 pad 2.18)
  other vias: 39.37,62.23
S$241  (via drill 0.25 pad 1.78)
  other vias: 44.45,67.31
S$242  (via drill 0.25 pad 1.78)
  other vias: 46.99,67.31
S$243  (via drill 0.25 pad 1.78)
  other vias: 49.53,67.31
S$244  (via drill 0.25 pad 2.18)
  other vias: 73.66,72.39 68.58,62.23 71.12,62.23 73.66,62.23
S$245  (via drill 0.25 pad 2.18)
  other vias: 76.2,72.39
S$246  (via drill 0.25 pad 2.18)
  other vias: 68.58,76.2
S$247  (via drill 0.25 pad 2.18)
  other vias: 63.5,73.66
S$248  (via drill 2.18)
  other vias: 102.87,77.47
S$249  (via drill 0.25 pad 2.18)
  other vias: 82.55,50.8
S$250  (via drill 0.25 pad 2.18)
  other vias: -2.54,62.23
S$251  (via drill 0.25 pad 2.18)
  other vias: 1.27,62.23
S$252  (via drill 0.25 pad 2.18)
  other vias: -8.89,36.83
S$253  (via drill 0.25 pad 2.18)
  other vias: 13.97,64.77
S$254  (via drill 0.25 pad 2.18)
  other vias: 13.97,69.85
S$255  (via drill 0.25 pad 2.18)
  other vias: 13.97,67.31
S$256  (via drill 0.25 pad 2.18)
  other vias: 13.97,62.23 10.16,36.83 10.16,34.29 10.16,31.75 10.16,29.21 2.54,29.21 2.54,31.75 2.54,34.29 2.54,36.83 52.07,33.02 52.07,30.48 52.07,27.94 29.21,45.72 29.21,43.18 29.21,40.64 29.21,38.1 29.21,35.56 29.21,33.02 29.21,30.48 21.59,30.48 21.59,33.02 21.59,35.56 21.59,38.1 21.59,40.64 21.59,43.18 21.59,45.72 67.31,33.02 69.85,33.02 72.39,33.02 74.93,33.02 74.93,40.64 72.39,40.64 69.85,40.64 67.31,40.64 83.82,46.99 86.36,46.99 88.9,46.99 91.44,46.99 83.82,39.37 86.36,39.37 88.9,39.37 91.44,39.37 -2.54,48.26 -5.08,48.26 -7.62,48.26
S$257  (via drill 0.25 pad 2.18)
  other vias: 21.59,69.85
S$258  (via drill 0.25 pad 2.18)
  other vias: 21.59,67.31
S$259  (via drill 0.25 pad 2.18)
  other vias: 21.59,62.23
S$260  (via drill 0.25 pad 2.18)
  other vias: 25.4,62.23
S$261  (via drill 0.25 pad 2.18)
  other vias: -5.08,72.39
S$262  (via drill 0.25 pad 2.18)
  other vias: -5.08,67.31
S$263  (via drill 0.25 pad 2.18)
  other vias: 16.51,73.66
S$264  (via drill 0.25 pad 2.18)
  other vias: 102.87,25.4
S$265  (via drill 0.25 pad 2.18)
  other vias: 102.87,25.4
S$266  (via drill 2.18)
  other vias: 102.87,25.4
S$267  (via drill 0.25 pad 2.18)
  other vias: 31.75,60.96
S$268  (via drill 0.25 pad 2.18)
  other vias: 60.96,55.88
S$269  (via drill 0.25 pad 3.3)
  other vias: 34.29,69.85
S$270  (via drill 0.25 pad 2.18)
  other vias: 57.15,22.86
(copper drawn outside any net)
  shapes: Bottom area x6

## Text on the board
Bottom: Pulse induction metal detector | Lucas 2004